# Altium PCB PCB1.PcbDoc
Units mil, origin at the board's own origin, x right, y up, seen from the top; angles counter-clockwise.
Board outline 2362.2 x 2362.2 mil, 2 copper layers (Top Layer, Bottom Layer); 67 components, 54 nets, 255 pads, 188 vias.
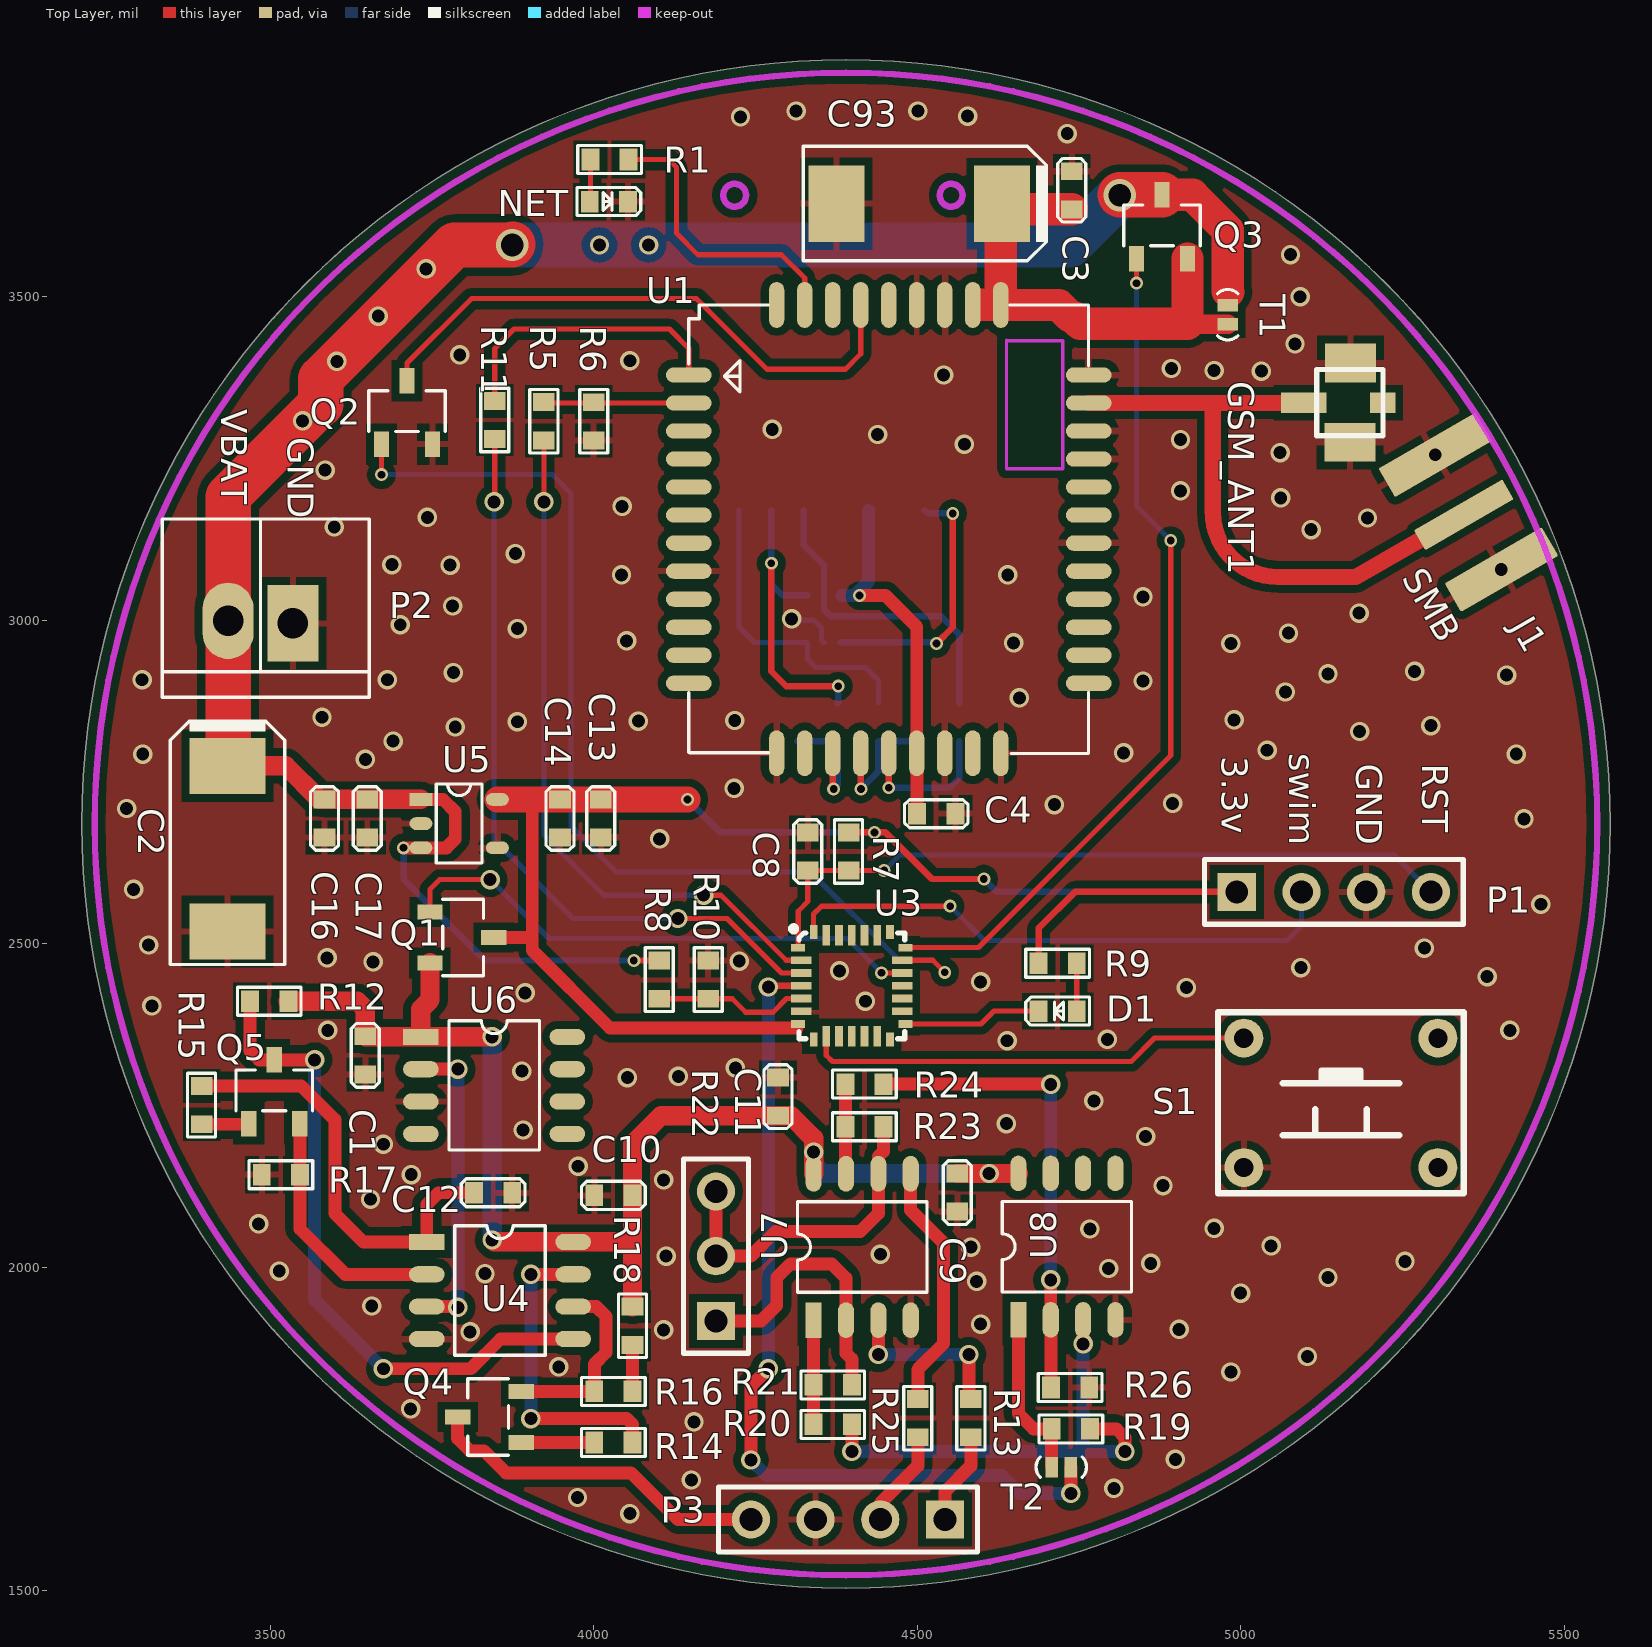
[diagram p0: Top Layer view]
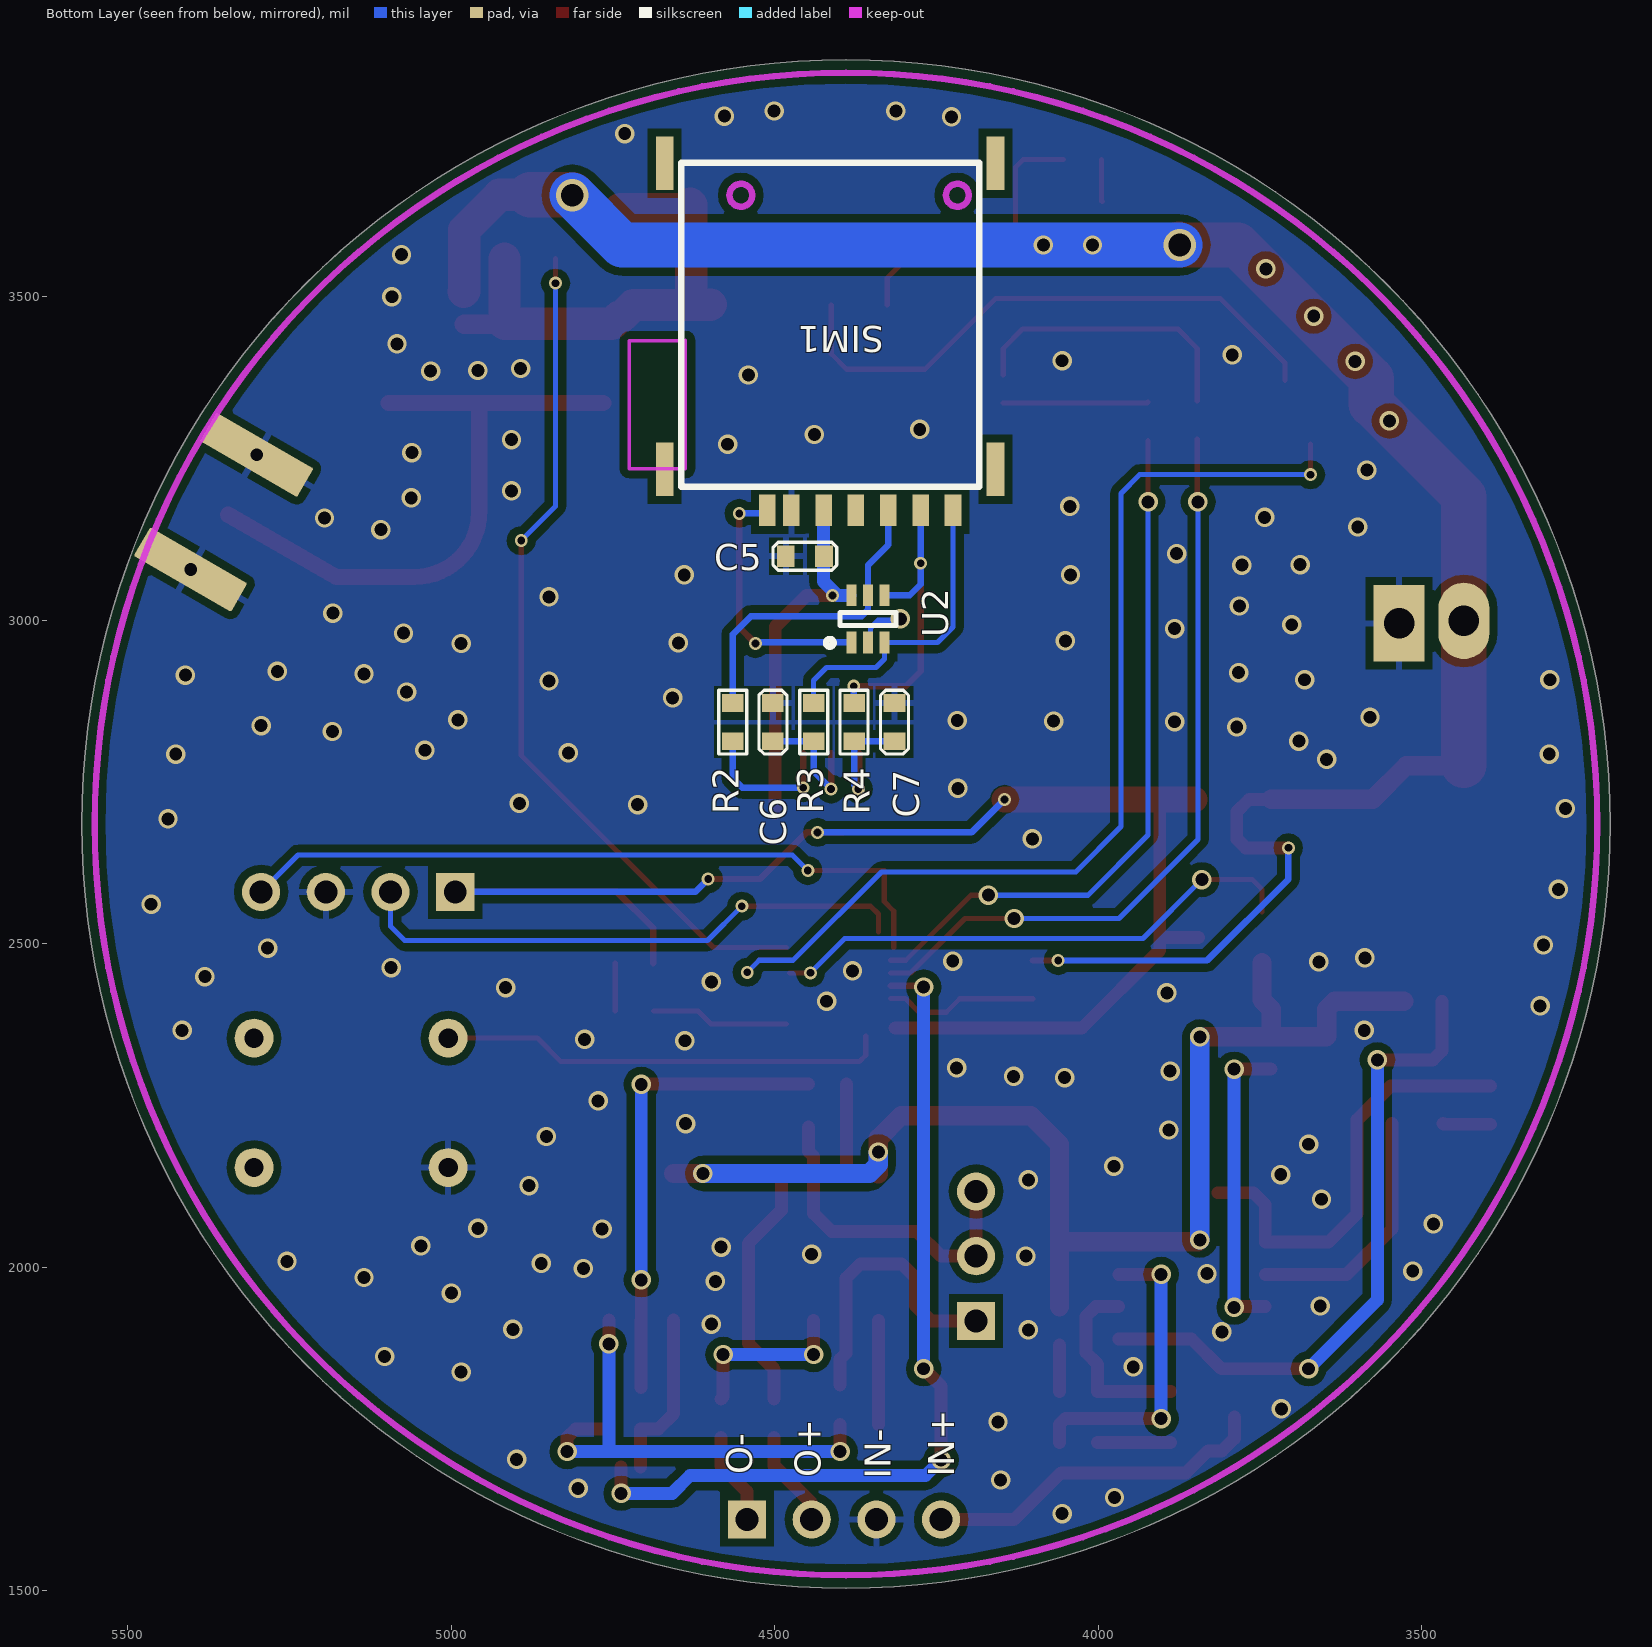
[diagram p1: Bottom Layer view, seen from below]

## Layer stack, top to bottom
Top Layer: signal copper 1.4
Dielectric: dielectric 12.6, FR-4, Dk 4.8
Bottom Layer: signal copper 1.4

## Board outline
3208.9,2685 ccw(c4390,2685) 4390,1503.9 ccw(c4390,2685) 5571.1,2685 ccw(c4390,2685) 4390,3866.1 ccw(c4390,2685)

## Design rules (kind name [scope] priority, off if disabled: settings)
Clearance [InPoly] p1: gap=12
Clearance Clearance_1 [All] p2: gap=10
PolygonConnect [IsVia] p1: connectstyle=Direct reliefconductorwidth=10 reliefentries=4 polygonreliefangle="90 Angle"
RoutingVias [All] p1: holewidth=28 width=50 viastyle="Through Hole" minholewidth=28 minwidth=50 maxholewidth=28 maxwidth=50
SilkscreenOverComponentPads [All] p1: minsilkscreentomaskgap=1
SolderMaskExpansion [All] p1: expansion=4
Width [All] p1: maxlimit=200 minlimit=5 preferedwidth=10
27 further rules are at their usual default settings.

## Classes and differential pairs
component class GPRS: C3 C4 C5 C6 C7 C93 GSM_ANT1 J1 NET Q2 Q3 R1 R2 R3 R4 R5 R6 R11 SIM1 T1 U1 U2
component class MCU: C8 D1 P1 R5 R7 R9 R10 S1 U3
component class power: C1 C2 C9 C10 C11 C12 C13 C14 C16 C17 P2 P3 Q1 Q4 Q5 Q6 R12 R13 R14 R15 R16 R17 R18 R19 R20 R21 R22 R23 R24 R25 R26 T1 U4 U5 U6 U7 U8

## Components (designator, comment, footprint, x,y, rotation, side; value= is the part's Value field where it differs from the comment)
C1 "0.1uF/10V" 0603C 3647,2357 r270 top
C2 "100uF/6.3V" 7343 3434,2775 r270 top
C3 "0.1uF/10V" 0603C 4739,3635 r90 top
C4 "220nF/10V" 0603C 4559,2701 r180 top
C5 "33pF/10V" 0603C 4483,3099 r180 bottom
C6 "33pF/10V" 0603C 4503,2813 r90 bottom
C7 "33pF/10V" 0603C 4315,2812.94 r90 bottom
C8 "0.1uF/10V" 0603C 4331,2613 r90 top
C9 "0.1uF/10V" 0603C 4562,2144.86 r270 top
C10 "0.1uF/10V" 0603C 4060,2111 r180 top
C11 "0.1uF/10V" 0603C 4285,2234 r90 top
C12 "0.1uF/10V" 0603C 3815,2115 r0 top
C13 "0.1uF/10V" 0603C 4011,2723 r270 top
C14 "10uF/10V" 0603C 3948,2663.94 r90 top
C16 "10uF/10V" 0603C 3584,2664 r90 top
C17 "0.1uF/10V" 0603C 3650,2723 r270 top
C93 "100uF/6.3V" 7343 4631,3644 r180 top
D1 "LED0" 0603LED 4746.67,2395.78 r180 top
GSM_ANT1 "IPX" IPX 5170,3387 r90 top
J1 "SMB" "SMA END LAUNCH JACK RECEPTACLE SHORT" 5345,3163 r300 top
NET "LED" 0603LED 3994,3647 r0 top
P1 "Header 4" HDR1X4 4994,2580 r0 top
P2 "Header 2" 2X2.54MM 3535,2995 r180 top
P3 "Header 4" HDR1X4 4543,1610 r180 top
Q1 "SI2306" SOT23-3 3747,2549 r180 top
Q2 "SI2306" SOT23-3 3672,3272 r270 top
Q3 "SI2306" SOT23-3 4839,3559 r270 top
Q4 "MMBT9015" SOT23-3 3888,1729 r0 top
Q5 "MMBT9013L" SOT23-3 3467,2222 r270 top
R1 "1K" 0603r 3995,3712 r0 top
R2 "10R/5%" 0603R 4565,2872 r270 bottom
R3 "10R/5%" 0603R 4440,2872 r270 bottom
R4 "10R/5%" 0603R 4377.5,2872 r270 bottom
R5 "1K" 0603R 3923,3278 r90 top
R6 "14K" 0603R 4000,3337 r270 top
R7 "10K" 0603R 4394,2613 r90 top
R8 "10K" 0603R 4101.35,2414.94 r90 top
R9 "1K" 0603R 4687.67,2469.78 r0 top
R10 "10K" 0603R 4177,2474 r270 top
R11 "1K" 0603R 3847,3339 r270 top
R12 "10K" 0603R 3469,2411 r0 top
R13 "10K" 0603R 4583,1737 r90 top
R14 "1K" 0603R 4060,1729 r180 top
R15 "1K" 0603R 3394,2280 r270 top
R16 "333" 0603R 4060,1808 r180 top
R17 "10K" 0603R 3487,2143 r0 top
R18 "100" 0603R 4060,1939 r270 top
R19 "100K" 0603R 4767,1750 r180 top
R20 "100K" 0603R 4340,1757 r0 top
R21 "100K" 0603R 4399.06,1818 r180 top
R22 "100K" HDR1X3 4189,1917 r90 top
R23 "100K" 0603R 4389,2217 r0 top
R24 "100K" 0603R 4389,2283 r0 top
R25 "10K" 0603R 4501,1737 r90 top
R26 "100K" 0603R 4766,1814 r180 top
S1 "SW-PB" key 5005,2354 r270 top
SIM1 "nano sim" "Nano SIM" 4512,3170 r0 bottom
T1 "TEST_P" TEST_P 4980,3487 r270 top
T2 "TEST_P" TEST_P 4708,1691 r0 top
U1 "SIM800C" SIM800C 4147,3379 r0 top
U2 "SMF05C" SC70-6L 4356,3002 r90 bottom
U3 "STM8L151G4U6" UFQFPN28 4320,2494 r0 top
U4 "LM258" so-8 3742,2039 r0 top
U5 "TLV70230DBVR" SOT23-5(DBV) 3733,2723 r0 top
U6 "MC1403DR" SO-8 3733,2356 r0 top
U7 "LM258" so-8 4340,1918 r90 top
U8 "LM258" so-8 4656.45,1918.48 r90 top

## Footprints (in the part's own frame and the unit in brackets; to place one, negate y for a bottom-side part, rotate by r counter-clockwise, add the part's x,y. Pads: shape width x height; smd on the part's side, far side on the other; paste and mask are expansions set on the pad)
2X2.54MM [mm]
  rect 2x3 hole 1.2: 1(0,0)
  oval 2x3 hole 1.2: 2(2.54,-0.1)
  silkscreen extent -3,-4.1 5.13,2.9
0603C [mm]
  rect 0.7x0.85 smd: 1(0,0) 2(1.5,0)
  silkscreen extent -0.5,-0.55 2,0.55
0603LED [mm]
  rect 0.7x0.85 smd: 1(0,0) 2(1.5,0)
  silkscreen extent -0.5,-0.55 2,0.55
0603r [mm]
  rect 0.7x0.85 smd: 1(0,0) 2(1.5,0)
  silkscreen extent -0.5,-0.55 2,0.55
0603R [mm]
  rect 0.7x0.85 smd: 1(0,0) 2(1.5,0)
  silkscreen extent -0.5,-0.55 2,0.55
7343 [mm]
  rect 2.2x3 smd: 1(0,0) 2(6.5,0)
  silkscreen extent -1.75,-2.25 7.8,2.25
HDR1X3 [mm] "Connector; Header; 3 Position"
  rect 1.5x1.5 hole 0.9: 1(0,0)
  round 1.5 hole 0.9: 2(2.54,0) 3(5.08,0)
  silkscreen extent -1.27,-1.27 6.35,1.27
HDR1X4 [mm] "Connector; Header; 4 Position"
  rect 1.5x1.5 hole 0.9: 1(0,0)
  round 1.5 hole 0.9: 2(2.54,0) 3(5.08,0) 4(7.62,0)
  silkscreen extent -1.27,-1.27 8.89,1.27
IPX [mil]
  rect 60x78.74 smd: 1(10.36,0) 3(-112,1)
  rect 31.5x70 smd: 2(-51,72.36)
  rect 31.5x39.37 smd: ""(-51,-50)
  silkscreen extent -102,-50 0,52
key [mil]
  round 60 hole 30: 1(0,0) 2(200,0) 3(0,300) 4(200,300)
  silkscreen extent -40,-40 240,340
"Nano SIM" [mm]
  rect 0.7x2.1 smd: 0(-8.97,-13.615) 0(-8.97,-1.615) 0(4.02,-13.615) 0(4.02,-1.615)
  rect 0.65x1.23 smd: 1(-2.22,0) 2(-4.76,0) 3(-7.3,0) 5(-0.95,0) 6(-3.49,0) 7(-6.03,0) 8(0,0)
  Keep-Out Layer circle w0.254: c1.03,-12.365 r0.45
  Keep-Out Layer circle w0.254: c-7.47,-12.365 r0.45
  silkscreen extent -8.33,-13.64 3.38,-0.91
SC70-6L [mm]
  rect 0.85x0.4 smd: 1(-0.925,0.65) 2(-0.925,0) 3(-0.925,-0.65) 4(0.925,-0.65) 5(0.925,0) 6(0.925,0.65)
  silkscreen extent -1.09,-1.1 0.25,1.65
SIM800C [mm]
  oval 1.8x0.6 smd: 1(0,0) 2(0,-1.1) 3(0,-2.2) 4(0,-3.3) 5(0,-4.4) 6(0,-5.5) 7(0,-6.6) 8(0,-7.7) 9(0,-8.8) 10(0,-9.9) 11(0,-11) 12(0,-12.1) 22(15.7,-12.1) 23(15.7,-11) 24(15.7,-9.9) 25(15.7,-8.8) 26(15.7,-7.7) 27(15.7,-6.6) 28(15.7,-5.5) 29(15.7,-4.4) 30(15.7,-3.3) 31(15.7,-2.2) 32(15.7,-1.1) 33(15.7,0)
  oval 0.6x1.8 smd: 13(3.45,-14.85) 14(4.55,-14.85) 15(5.65,-14.85) 16(6.75,-14.85) 17(7.85,-14.85) 18(8.95,-14.85) 19(10.05,-14.85) 20(11.15,-14.85) 21(12.25,-14.85) 34(12.25,2.75) 35(11.15,2.75) 36(10.05,2.75) 37(8.95,2.75) 38(7.85,2.75) 39(6.75,2.75) 40(5.65,2.75) 41(4.55,2.75) 42(3.45,2.75)
  Keep-Out Layer lines w0.127: 12.471,1.372 12.471,-3.683 14.681,-3.683 14.681,1.346 12.522,1.346
  silkscreen extent 0,-14.86 15.7,2.74
"SMA END LAUNCH JACK RECEPTACLE SHORT" [mm] "SMA Connector - End Launch Jack Receptacle - Short"
  rrect10% 0.9x4 smd paste+0 mask+0.05: 1(0,0)
  rrect10% 1.3x4.4 hole 0.5 mask+0.05: 2(-2.6,0.2) 2(2.6,0.2)
  body extent -0.5,-2.05 0.5,2.05, height 8
so-8 [mil]
  rect 55x25 smd: 1(0,0)
  oval 55x25 smd: 2(0,-50) 3(0,-100) 4(0,-150) 5(226.38,-150) 6(226.38,-100) 7(226.38,-50) 8(226.38,0)
  silkscreen extent 43,-175 183,25
SO-8 [mil]
  rect 55x25 smd: 1(0,0)
  oval 55x25 smd: 2(0,-50) 3(0,-100) 4(0,-150) 5(226.38,-150) 6(226.38,-100) 7(226.38,-50) 8(226.38,0)
  silkscreen extent 43,-175 183,25
SOT23-3 [mm]
  rect 1x0.6 smd: 1(0,0) 2(0,2) 3(-2.5,1)
  silkscreen extent -2.1,-0.5 -0.5,2.5
SOT23-5(DBV) [mm]
  rect 0.9x0.5 smd: 1(0,0)
  oval 0.9x0.5 smd: 2(0,-0.95) 3(0,-1.9) 4(3,-1.9) 5(3,0)
  silkscreen extent 0.6,-2.5 2.4,0.6
TEST_P [mm]
  rect 0.5x0.8 smd: 1(0,0) 2(0.75,0)
  silkscreen extent -0.62,-0.4 1.37,0.4
UFQFPN28 [mm]
  rect 0.55x0.3 smd: 1(-0.1,0) 7(-0.1,-3) 15(4.11,-3) 21(4.11,0)
  rect 0.8x0.3 smd: 2(0.025,-0.5) 3(0.025,-1) 4(0.025,-1.5) 5(0.025,-2) 6(0.025,-2.5) 16(3.985,-2.5) 17(3.985,-2) 18(3.985,-1.5) 19(3.985,-1) 20(3.985,-0.5)
  rect 0.3x0.55 smd: 8(0.505,-3.605) 14(3.505,-3.605) 22(3.505,0.605) 28(0.505,0.605)
  rect 0.3x0.8 smd: 9(1.005,-3.48) 10(1.505,-3.48) 11(2.005,-3.48) 12(2.505,-3.48) 13(3.005,-3.48) 23(3.005,0.48) 24(2.505,0.48) 25(2.005,0.48) 26(1.505,0.48) 27(1.005,0.48)
  silkscreen extent -0.37,-3.58 4.08,0.83

## Part data
C1 C3 C4 C5 C6 C7 C8 C9 C10 C11 C13 C14 C16 C17: library part Cap, "Capacitor"
C2 C93: library part "Cap Pol1", "Polarized Capacitor (Radial)"
C12: library part CAP, "Capacitor"
D1: "Typical INFRARED GaAs LED"
GSM_ANT1: library part IPEX, "IPEX座"
J1: "SMB Straight Connector"
NET: library part LED2, "Typical RED, GREEN, YELLOW, AMBER GaAs LED"
P1 P3: "Header, 4-Pin"
P2: "Header, 2-Pin"
Q1 Q2 Q3: library part BUK92150-55A, "BUK92150-55A"
Q4: library part PNP
Q5: library part NPN
R1: library part R
R2 R3 R4 R5 R6 R9 R11: library part Res2, "Resistor"
R7 R8 R10 R12 R13 R14 R15 R16 R17 R18 R19 R20 R21 R23 R24 R25 R26: library part R, "R"
R22: library part RPot, "Potentiometer"
S1: "Switch"

## Via types
v1: diameter 30, hole 20, Top Layer to Bottom Layer, tented both sides, 166 vias
v2: diameter 20, hole 12, Top Layer to Bottom Layer, tented both sides, 20 vias
v3: diameter 50, hole 35, Top Layer to Bottom Layer, tented both sides, 2 vias

## Nets (pads, with @x,y where several pads share a name; then routed paths per layer and width w, separated by ;. In a path a pad name is that pad's centre, name@x,y a point inside that pad or via, vN(x,y) a via of type N, cw(c..) or ccw(c..) an arc to the next point about the centre after c; other vN are vias at no path point)
2.5V_REF1: U4.3 U6.2 | length 473.4
  Top Layer w20: U6.2 v1(3790,2306) ; U4.3 3789,1939 v1(3790,1938)
  Bottom Layer w20: v1(3790,1938) v1(3790,2306)
CURR_EN1: U3.8
GND: C1.2 C2.2 C3.2 C4.1 C5.1 C6.2 C7.2 C8.2 C9.2 C10.2 C11.2 C12.2 C13.2 C14.1 C16.1 C17.2 C93.2 GSM_ANT1.1 GSM_ANT1.3 J1.2 NET.2 P1.3 P2.1 P3.3 Q2.2 R6.2 R10.1 R17.1 R26.1 S1.2 SIM1.5 U1.8 U1.13 U1.19 U1.21 U1.27 U1.30 U1.31 U1.33 U1.36 U1.37 U2.2 U3.6 U4.4 U5.2 U5.4 U6.3 U7.4 U8.4 | length 76.3
  Bottom Layer w8: v1(4306,3002) 4306,3001.69 4307.69,3000 4340.4,3000 4352.28,2988.11 4352.28,2969.3 U2.2
  other v1: 4056,1619 3975,1644 4804,1658 4151,1671 4899,1703 4155,1761 3717,1781 4985,1838 3946,1846 5103,1862 3809,1900 4108,1903 4905,1904 4598,1912 3657,1940 5000,1960 4592,1978 5135,1984 3832,1990 3514,1994 4796,1998 4861,2006 5254,2009 4112,2017 4443,2020 4583,2031 5047,2033 4767,2059 4959,2060 3482,2067 3655,2105 4880,2126 4108,2135 3718,2143 3976,2156 3675,2190 4853,2202 3891,2212 4638,2222 4773,2257 4052,2293 4131,2295 3889,2303 4219,2308 4639,2350 4794,2352 3589,2366 5416,2366 3317,2404 4420,2411 3894,2424 4916,2432 4598,2441 5381,2449 4380,2458 5093,2463 3659,2472 4225,2473 3588,2478 5284,2493 3312,2498 5464,2561 3289,2584 4102,2662 5438,2693 3278,2709 4712,2715 4895,2717 4217,2740 3647,2785 3303,2793 5426,2793 4819,2795 5041,2799 3690,2813 5184,2828 3786,2835 5294,2837 3882,2843 4069,2844 4218,2845 4990,2846 3580,2850 4658,2880 5069,2889 4849,2906 3302,2908 3681,2908 5411,2915 5135,2917 3783,2919 5269,2921 4985,2964 4649,2965 4051,2968 5074,2980 3882,2987 3701,2993 5183,3011 3782,3022 4849,3036 4043,3070 4640,3070 3778,3085 3688,3086 3879,3103 5109,3140 3599,3144 5196,3158 3743,3159 4044,3176 5062,3189 4907,3200 3585,3232 5061,3259 4573,3272 4907,3279 4439,3287 4276,3295 4541,3379 5032,3385 4959,3386 4893,3389 4056,3401 3793,3410 5084,3427 5092,3500 5077,3565 4732,3752 4227,3778 4578,3779 4313,3787 4501,3787
NetC12_1: C12.1 R15.1 U4.1 | length 671.2
  Top Layer w20: R15.1 3548,2280 3600,2228 3600,2083 3644,2039 U4.1 3742,2097 3760,2115 C12.1
NetD1_1: D1.1 R9.2 | length 74
  Top Layer w8: D1.1 D1.1 R9.2
NetD1_2: D1.2 U3.15 | length 214
  Top Layer w8: U3.15 4598.89,2375.89 4618.78,2395.78 D1.2
NetGSM_ANT1_2: GSM_ANT1.2 J1.1 U1.32 | length 971.6
  Top Layer w25: U1.32 4957,3335.69 ; GSM_ANT1.2@5097.31,3335.69 4957,3335.69 ; J1.1 5178,3067 5057,3067 cw(c5057,3167) 4957,3167 4957,3335.69
NetNET_1: NET.1 R1.1 | length 65.4
  Top Layer w8: NET.1 3995,3648 R1.1
NetQ4_1: Q4.1 R14.2 | length 112.9
  Top Layer w20: Q4.1 R14.2
NetQ4_2: Q4.2 R16.2 U4.6 | length 293
  Top Layer w20: Q4.2 R16.2@4000.69,1807.74 ; U4.6 4004,1939 4019,1924 4019,1868 4000.94,1849.94 R16.2
NetQ5_1: Q5.1 R15.2 | length 73.4
  Top Layer w20: R15.2 3465.94,2220.94 Q5.1
NetQ5_2: Q5.2 R17.2 U4.2 | length 388.1
  Top Layer w20: Q5.2 3545.74,2143.31 R17.2 3546.06,2058.94 3616,1989 U4.2
NetQ5_3: Q5.3 R12.1 U4.5 | length 1016.1
  Top Layer w20: R12.1 3469,2334 3482.57,2320.43 Q5.3 v1(3568.57,2320.43) ; v1(3675,1843) 3810,1843 3856,1889 U4.5
  Bottom Layer w20: v1(3568.57,2320.43) 3568.57,1949.43 v1(3675,1843)
NetR1_2: R1.2 U1.41 | length 449.3
  Top Layer w8: R1.2 4116,3712 4128,3700 4128,3598 4161,3565 4290,3565 4326.13,3528.87 U1.41
NetR2_1: R2.1 SIM1.2 U2.5 | length 497.7
  Bottom Layer w10: SIM1.2 4324.6,3116.4 4356,3085 U2.5 4356,3016 4366,3006 4537,3006 4565,2978 R2.1
NetR3_1: R3.1 SIM1.3 U2.3 | length 480
  Bottom Layer w8: SIM1.3 4224.6,2989.4 4248.42,2965.58 U2.3 4330.41,2940.18 4343.59,2927 4420,2927 4440,2907 R3.1
NetR4_1: R4.1 SIM1.7 U2.4 | length 483.6
  Top Layer w10: v2(4274.6,3088) 4274.6,2921 4297.6,2898 v2(4378,2898)
  Bottom Layer w10: SIM1.7 v2(4274.6,3088) 4274.6,3055.4 4291.58,3038.42 U2.4 ; R4.1 4378,2872.5 v2(4378,2898)
NetR13_2: R13.2 U7.3 | length 263.2
  Top Layer w20: v1(4440,1865) U7.3 ; v1(4580,1865) 4580,1799.06 R13.2
  Bottom Layer w20: v1(4440,1865) v1(4580,1865)
NetR14_1: R14.1 U4.7 | length 477.1
  Top Layer w20: v1(3903,1766) 4051,1766 4060,1757 R14.1 ; v1(3903,1989) U4.7
  Bottom Layer w20: v1(3903,1766) v1(3903,1989)
NetR16_1: R16.1 R18.2 | length 71.9
  Top Layer w20: R16.1 R18.2
NetR19_1: R19.1 R20.2 U8.3 | length 745
  Top Layer w20: v1(4399.06,1715.06) R20.2 ; v1(4756.45,1881.55) U8.3 ; R19.1 4808,1750 4820.94,1737.06 v1(4820.94,1715.06)
  Bottom Layer w20: v1(4399.06,1715.06) v1(4820.94,1715.06) ; 4756.45,1718.61 v1(4756.45,1881.55)
NetR19_2: R19.2 T2.1 U8.1 | length 265.3
  Top Layer w20: U8.1 4656.45,1773.55 4680,1750 R19.2 4707.69,1749.74 T2.1@4707.69,1691
NetR20_1: R20.1 R21.2 U7.1 | length 161
  Top Layer w20: R20.1 U7.1
NetR21_1: R21.1 R22.1 U7.2 | length 440.5
  Top Layer w20: R22.1 4259,1917 4283,1941 4283,1984 4304,2005 4368,2005 4390,1983 U7.2 4390,1867 4399.06,1857.94 R21.1
NetR22_2: R22.2 R22.3 R23.2 U7.6 | length 515.7
  Top Layer w20: R22.3 R22.2 4243,2017 4281,2055 4412,2055 4440,2083 U7.6 4440,2171 4448.06,2179.06 R23.2
NetR23_1: R23.1 R24.1 U7.7 | length 139
  Top Layer w20: R24.1 R23.1 4389,2145.38 U7.7
NetR24_2: R24.2 R26.2 U8.2 | length 726.7
  Top Layer w20: R24.2 v1@4706,2283 ; v1(4706.45,1980.45) U8.2 4706.94,1917.98 R26.2
  Bottom Layer w20: v1(4706.45,1980.45) v1(4706.45,2282.55)
NetR25_2: R25.2 U7.5 | length 386
  Top Layer w20: U7.5 4490,2088 4541,2037 4541,1882 4501,1842 R25.2
NetS1_1: S1.1 U3.9 | length 693.8
  Top Layer w8: U3.9 4359.57,2327.43 4369,2318 4831,2318 4867,2354 S1.1
NetSIM1_8: SIM1.8 U2.1 | length 404.1
  Top Layer w10: v2(4530,2964) 4555,2989 v2(4555,3165)
  Bottom Layer w10: U2.1 4528.42,2965.58 v2@4529,2965 ; SIM1.8 4517,3165 v2(4555,3165)
OUT+: P3.2 R25.1 | length 151
  Top Layer w20: P3.2 4443,1635 4501,1693 R25.1
OUT-: P3.1 R13.1 | length 143.6
  Top Layer w20: P3.1 4543,1653 4583,1693 R13.1
P1: P3.4 Q4.3 | length 538.3
  Top Layer w20: Q4.3 3789.57,1735.43 3808.85,1716.15 3830.54,1716.15 3864.69,1682 4058,1682 4130,1610 P3.4
POWER: Q3.1 U3.21 | length 1323.2
  Top Layer w8: U3.21 4595,2494 4892,2791 v2(4892,3123) ; v2(4839,3521) Q3.1
  Bottom Layer w8: v2(4839,3521) 4839,3176 v2(4892,3123)
PWRKEY: Q2.3 U1.39 | length 900.1
  Top Layer w8: Q2.3 3711.37,3397.37 3811,3497 4159,3497 4268,3388 4389,3388 4412.75,3411.75 U1.39
PWRKEY_IN: Q2.1 U3.20 | length 1617.1
  Top Layer w8: v2(3672,3225) Q2.1 ; U3.20 4524.13,2474.32 v2(4542.67,2455.78)
  Bottom Layer w8: v2(3672,3225) 3936,3225 3965,3196 3965,2681 4035,2611 4335,2611 4471.69,2474.32 4505,2474.32 ; 4510.69,2474.32 4505,2474.32 ; v2(4542.67,2455.78) 4524.13,2474.32 4505,2474.32
RST: C8.1 P1.4 R7.1 U3.1 | length 1121.7
  Top Layer w8: U3.1 4316.06,2550.06 4331,2565 C8.1 R7.1 v2(4449,2613)
  Bottom Layer w8: v2(4449,2613) 4473,2637 5237,2637 P1.4
RXD: R11.2 U3.3 | length 1178.4
  Top Layer w8: v1@3847,3184 R11.2 ; v1(4130,2539) 4206,2539 4290.37,2454.63 U3.3
  Bottom Layer w8: v1(3846,3183) 3846,2661 3968,2539 v1(4130,2539)
SENSOR_EN: Q1.1 U3.19 | length 859.9
  Top Layer w8: Q1.1 3747,2584 3762,2599 v1(3840,2599) ; v2(4445,2455) 4445.37,2454.63 U3.19
  Bottom Layer w8: v1(3840,2599) 3931,2508 4051,2508 ; 4022,2508 4051,2508 ; v2(4445,2455) 4392,2508 4051,2508
SENSOR_OUT: T2.2 U3.4 | length 1347.6
  Top Layer w10: v1@4271.94,2434.95 U3.4
  Top Layer w20: v1(4243,1702) 4243,1816 v1(4270,1843) ; v1(4737.53,1650.47) T2.2
  Bottom Layer w20: v1(4243,1702) 4267,1678 4631,1678 4658.53,1650.47 v1(4737.53,1650.47) ; v1(4270,1843) v1(4270,2433)
SIM800_VBAT: C3.1 C93.1 Q3.2 T1.2 U1.34 U1.35 | length 765.3
  Top Layer w30: 4917.46,3457.47 T1.2
  Top Layer w50: 4599,3488 4599.73,3487.27 U1.34 ; C93.1 C93.1@4629.28,3642.28 ; C3.1 4636.57,3635 C93.1@4629.28,3642.28 ; Q3.2 4917.74,3457.73 4917.46,3458.02 4884.02,3458.02 4752.02,3458.02 4740.53,3469.5 4736.5,3469.5 4718.73,3487.27 U1.34 ; U1.34 C93.1@4629.28,3642.28
SIM_RX: R5.2 R6.1 U1.2 | length 224.6
  Top Layer w8: R5.2 3924.36,3335.69 U1.2
SIM_TX: R11.1 U1.1 | length 446.9
  Top Layer w8: R11.1 3847,3420 3877,3450 4117,3450 4147,3420 U1.1
SIMC_CLK: C6.1 R3.2 U1.16 | length 203.6
  Top Layer w10: U1.16 4412.75,2739.25 v2(4413,2739)
  Bottom Layer w10: v2(4413,2739) 4440,2766 R3.2 4502.94,2812.94 C6.1
SIMC_DATA: C7.1 R4.2 U1.15 | length 195.1
  Top Layer w10: U1.15 4369.44,2740.56 v2(4371,2739)
  Bottom Layer w10: C7.1 R4.2 4377.5,2745.5 v2(4371,2739)
SIMC_RST: R2.2 U1.17 | length 225.4
  Top Layer w10: v2(4456.05,2741.05) U1.17
  Bottom Layer w10: v2(4456.05,2741.05) 4550.05,2741.05 4565,2756 R2.2
SWIM: P1.2 U3.28 | length 871.3
  Top Layer w8: U3.28 4339.88,2545.88 4352,2558 v2(4551,2558)
  Bottom Layer w8: v2(4551,2558) 4604,2505 5072,2505 5094,2527 P1.2
TXD: R5.1 U3.2 | length 1088.2
  Top Layer w8: v1(3923,3183) R5.1 ; v1(4170,2575) 4197,2575 4297.69,2474.32 U3.2
  Bottom Layer w8: v1(3923,3183) 3923,2668 4016,2575 v1(4170,2575)
VBAT: C2.1 C16.2 C17.1 P2.2 Q3.3 R8.2 T1.1 U5.1 U5.3 | length 3300
  Top Layer w10: v2(4062,2474) R8.2
  Top Layer w20: v2(3706.2,2648.2) U5.3 3772.2,2648.2 3786,2662 3786,2704 3767,2723 U5.1
  Top Layer w30: C2.1 3524,2775 3575.94,2723.06 C16.2 3584.06,2723 C17.1 U5.1
  Top Layer w50: Q3.3 4925.7,3657.43 4980,3603.12 4980,3508.47 4981,3507.47
  Top Layer w70: C2.1@3435,2776 P2.2 3435,3191 3578,3334 3578,3373 3785,3580 v3(3874,3580) v3@3875,3581 ; v3@4813.43,3657.43 Q3.3
  Bottom Layer w10: v2(3706.2,2648.2) 3706.2,2599.8 3832,2474 v2(4062,2474)
  Bottom Layer w70: v3(3874,3580) 4736,3580 v3(4813,3657)
  other v1: 3550,3308 3603,3400 3667,3470 3741,3543 4009,3580 4085,3580
VBAT_ADC: R8.1 R10.2 U3.5 | length 237.3
  Top Layer w8: R8.1 R10.2@4162.24,2414.94 ; R10.2@4162.35,2415.06 R10.2@4162.24,2414.94 ; U3.5 4298.26,2415.26 4277,2394 4235,2394 4214.06,2414.94 R10.2@4162.24,2414.94
VCC_3V: C13.1 C14.2 P1.1 Q1.3 R7.2 R9.1 U3.7 U5.5 | length 2377.1
  Top Layer w10: R7.2 4433.94,2672.06 v2(4434,2672) 4451,2672 4523,2600 v2(4603,2600) ; R9.1 4687.67,2523.67 4744,2580 P1.1
  Top Layer w20: Q1.3 3905,2509.63 ; 3905,2723 3905,2490 4025.33,2369.67 4313.98,2369.67
  Top Layer w40: U5.5 3905,2723 C14.2 C13.1 v2(4145,2723)
  Bottom Layer w10: v2(4145,2723) 4196,2672 v2(4434,2672) ; v2(4603,2600) 4623,2580 P1.1
VCC_3V_SENSOR: C1.1 C9.1 C10.1 C11.1 Q1.2 R12.2 R18.1 U4.8 U6.1 U7.8 U8.8 | length 2015.2
  Top Layer w30: R12.2 3635,2411 3647,2399 C1.1 3648,2356 U6.1 ; Q1.2 3747,2413 3733,2399 U6.1 ; v1(3843,2356) U6.1 ; v1@3846,2039 U4.8 4058,2039 ; R18.1 4060,2190 4104,2234 4305,2234 4340,2199 v1(4340,2178) U7.8 ; C9.1 v1(4611.14,2144.86) U8.8
  Bottom Layer w30: v1(3843,2042) v1(3843,2356) ; v1@4340,2176 4340,2159 4354.14,2144.86 v1(4611.14,2144.86)
VCC_EXT: U1.40
VSIM: C4.2 C5.2 SIM1.1 U1.18 U2.6 | length 557.3
  Top Layer w20: v2(4411,3038) 4451.28,3038 4499.36,2989.92 U1.18 4499.94,2793.77 C4.2
  Bottom Layer w20: U2.6@4383.87,3038.42 4403.42,3038.42 4424.6,3059.6 SIM1.1
pads on no net: GSM_ANT1. S1.3 S1.4 SIM1.0 SIM1.6 U1.3 U1.4 U1.5 U1.6 U1.7 U1.9 U1.10 U1.11 U1.12 U1.14 U1.20 U1.22 U1.23 U1.24 U1.25 U1.26 U1.28 U1.29 U1.38 U1.42 U3.10 U3.11 U3.12 U3.13 U3.14 U3.16 U3.17 U3.18 U3.22 U3.23 U3.24 U3.25 U3.26 U3.27 U6.4 U6.5 U6.6 U6.7 U6.8 U8.5 U8.6 U8.7

## Polygon pours and split planes (outlines as drawn)
GND on Top Layer "Top Layer-No Net" (solid, remove dead copper, pour order 1000): 3041,3934 3046,3939 5462,3939 5462,3631 5689,3404 5745,3348 5745,2295 5745,2194 5044,1493 5009,1458 3546,1458 3505,1458 3228,1735 3046,1917 3046,3944
GND on Bottom Layer "Top Layer-No Net" (solid, remove dead copper, pour order 1001): 2877,3920 3055,4098 5439,4098 5439,3718 6021,3136 5932,3047 5932,1746 5206,1746 4971,1511 4866,1406 3338,1406 3338,1519 3176,1681 2950,1907 2950,3976

## Keep-outs
Keep-Out Layer:
  circle w10: c4390,2685 r1161.42

## Silkscreen, mask and mechanical layers (free items; w line width, h text height)
Top Overlay:
  text "VBAT" at 3424,3326 h40 r270
  text "GND" at 3527,3283 h40 r270
  text "swim" at 5075,2794 h40 r270
  text "3.3v" at 4971,2790 h40 r270
  text "GND" at 5179,2778 h40 r270
  text "RST" at 5281,2778 h40 r270
Bottom Overlay:
  text "O-" at 4535,1680 h40 r270
  text "IN+" at 4223,1676 h40 r270
  text "O+" at 4429,1675 h40 r270
  text "IN-" at 4321,1673 h40 r270
Mechanical 1:
  circle w10: c4390,2685 r1181.1